# EAGLE board Proto2-PCB v74 (EAGLE 9.7.0)
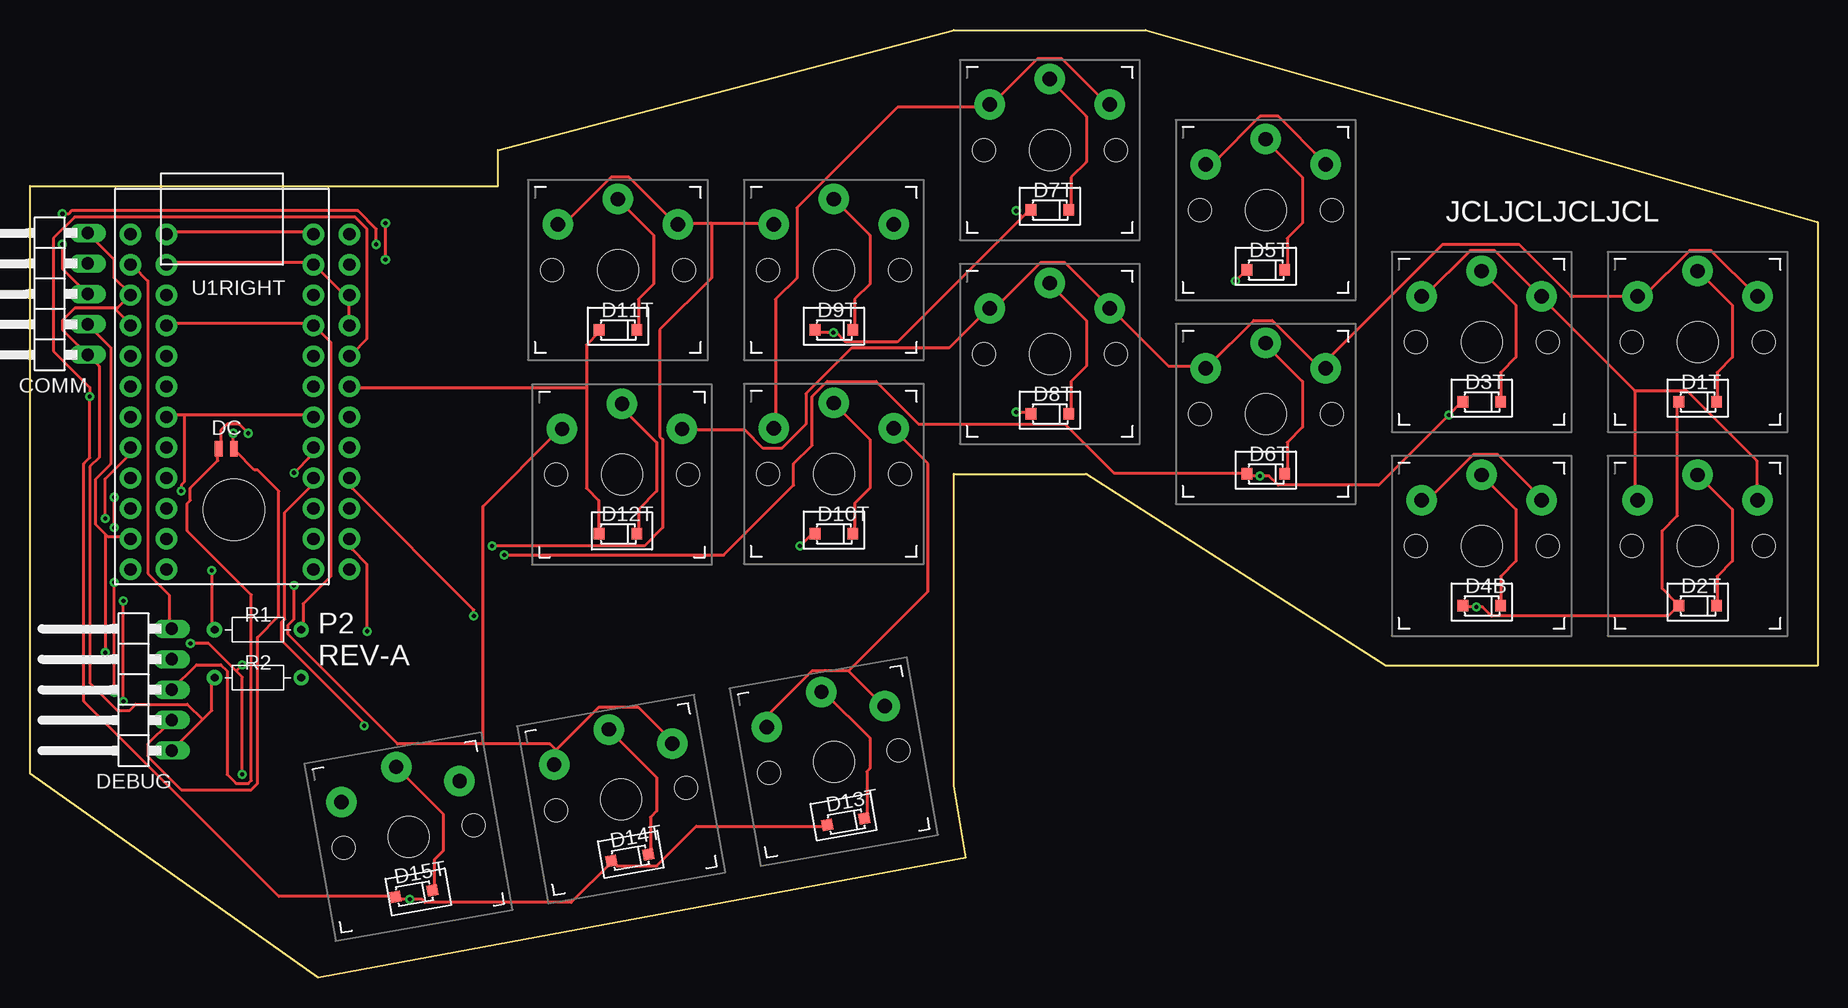
[diagram p0: board, top side]
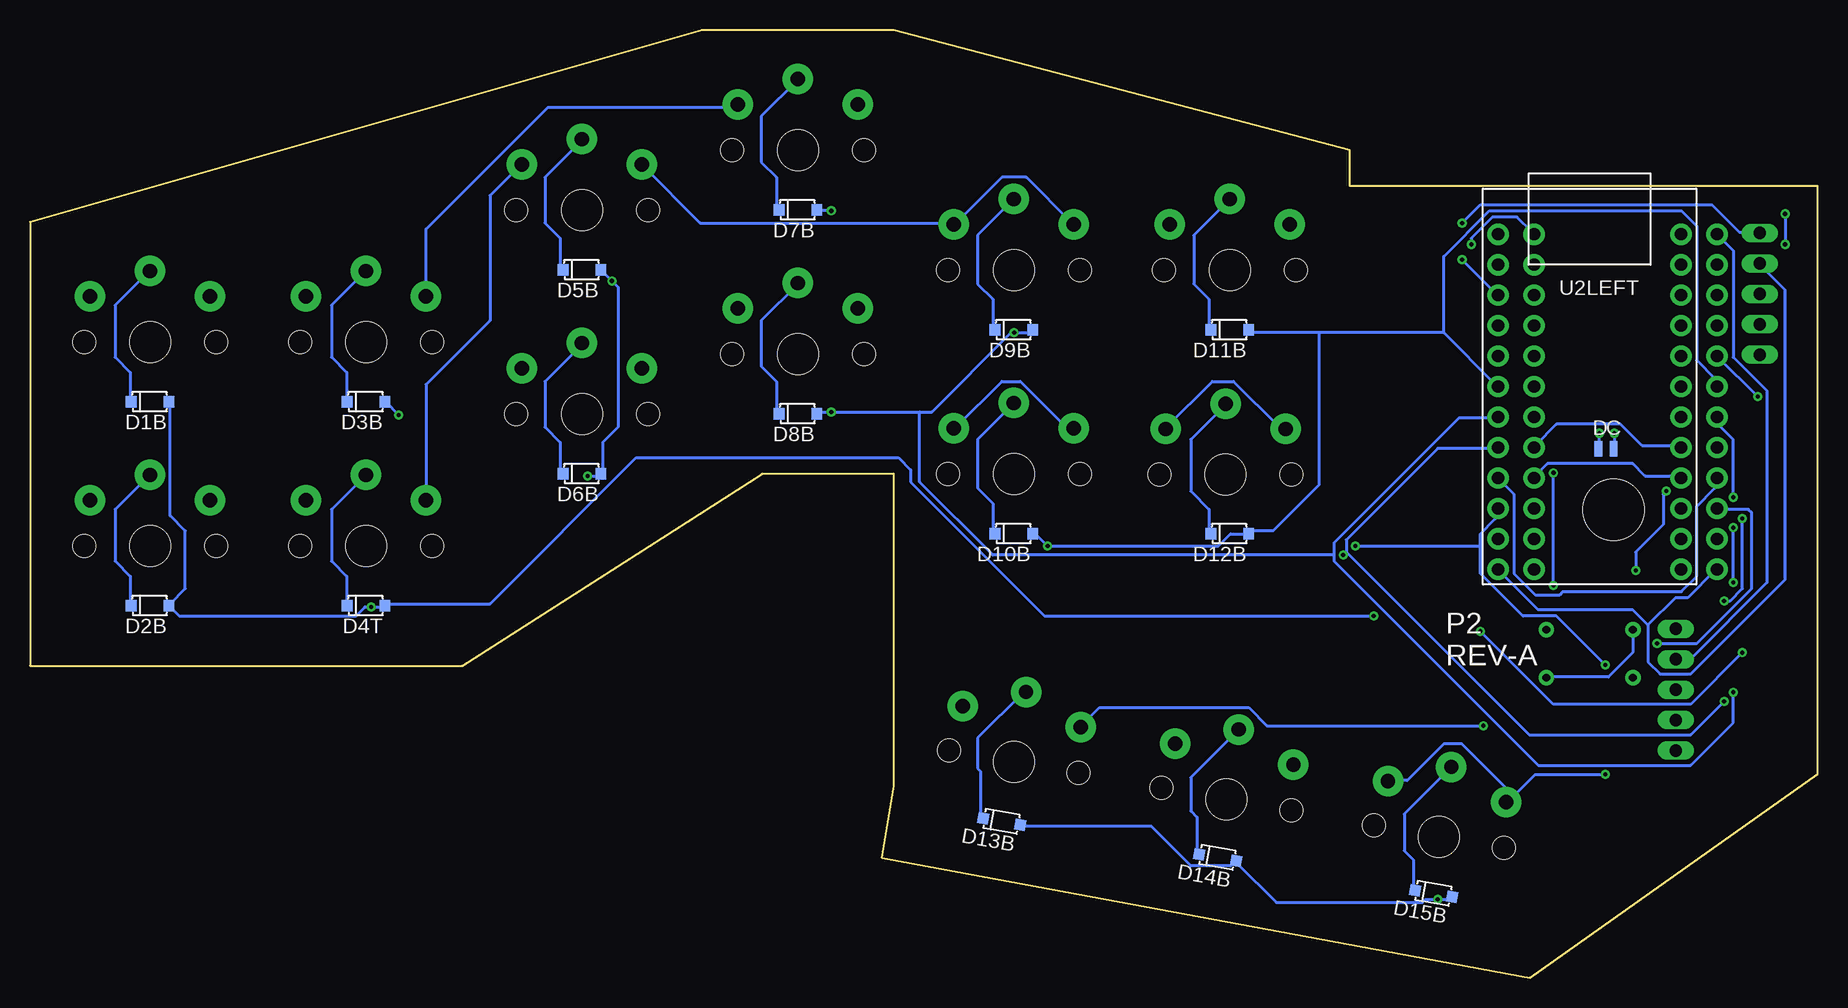
[diagram p1: board, bottom side, seen from below]

Size 149 x 79 mm. Coordinates in mm from the lower left corner, seen from the top.
Outline: 24,0 0,17 0,66 39,66 39,69 77,79 93,79 149,63 149,26 113,26 88,42 77,42 77,16 78,10 24,0
Copper layers (1*16): Top / Bottom
Stack-up Default Layer Stack: Top User Defined 0.035mm / Dielectric-1 User Defined 1.6mm / Bottom User Defined 0.035mm
Design rules "default *": minimum track width 10mil, minimum drill 0.35mm, track to track 10mil, track to pad 10mil, pad to pad 10mil, via to via 10mil, smd to smd 10mil, copper to edge 40mil, drill to drill 12mil, minimum pad ring 10mil, minimum via ring 8mil, stop-mask expansion 4mil, vias tented up to drill 0mil, thermal gap 10mil

## Footprints (pad centres in the part's own frame; a part is rotated, then mirrored left to right if it is on the bottom)
1X05/90 = drill 1.016 long: 1 -5.08,-3.81; 2 -2.54,-3.81; 3 0,-3.81; 4 2.54,-3.81; 5 5.08,-3.81
SOD123 = smd 0.9 x 0.95: A -1.575,0; C 1.575,0
RESAD724W46L381D178B = drill 0.66 pad 1.26: 1 -3.62,0; 2 3.62,0
PG1350 = drill 1.2 pad 2.54: 1 5.9,0; 2B 3.8,5; 2T 3.8,-5 | hole 3.4: 0,0 | hole 1.9: 0,5.5; 0,-5.5
PRO-MICRO-RP2040-SOCKETED = drill 1.016 pad 1.778: 1 -7.62,13.97; 2 -7.62,11.43; 3 -7.62,8.89; 4 -7.62,6.35; 5 -7.62,3.81; 6 -7.62,1.27; 7 -7.62,-1.27; 8 -7.62,-3.81; 9 -7.62,-6.35; 10 -7.62,-8.89; 11 -7.62,-11.43; 12 -7.62,-13.97; 13 7.62,-13.97; 14 7.62,-11.43; 15 7.62,-8.89; 16 7.62,-6.35; 17 7.62,-3.81; 18 7.62,-1.27; 19 7.62,1.27; 20 7.62,3.81; 21 7.62,6.35; 22 7.62,8.89; 23 7.62,11.43; 24 7.62,13.97
SWD-TP-HEADER = smd 0.635 x 1.27 bottom: BOT_C 0,5.08; BOT_D 1.27,5.08 | smd 0.635 x 1.27: TOP_C 0,5.08; TOP_D -1.27,5.08 | hole 5.08: 0,0

## Placement (x,y rotation side)
COMM  PINHD-1X5/90  [1X05/90]  1,57 90 top
D1B  BAV19W  [SOD123]  139,48 180 bottom
D1T  BAV19W  [SOD123]  139,48 0 top
D2B  BAV19W  [SOD123]  139,31 180 bottom
D2T  BAV19W  [SOD123]  139,31 0 top
D3B  BAV19W  [SOD123]  121,48 180 bottom
D3T  BAV19W  [SOD123]  121,48 0 top
D4B  BAV19W  [SOD123]  121,31 0 top
D4T  BAV19W  [SOD123]  121,31 180 bottom
D5B  BAV19W  [SOD123]  103,59 180 bottom
D5T  BAV19W  [SOD123]  103,59 0 top
D6B  BAV19W  [SOD123]  103,42 180 bottom
D6T  BAV19W  [SOD123]  103,42 0 top
D7B  BAV19W  [SOD123]  85,64 180 bottom
D7T  BAV19W  [SOD123]  85,64 0 top
D8B  BAV19W  [SOD123]  85,47 180 bottom
D8T  BAV19W  [SOD123]  85,47 0 top
D9B  BAV19W  [SOD123]  67,54 180 bottom
D9T  BAV19W  [SOD123]  67,54 0 top
D10B  BAV19W  [SOD123]  67,37 180 bottom
D10T  BAV19W  [SOD123]  67,37 0 top
D11B  BAV19W  [SOD123]  49,54 180 bottom
D11T  BAV19W  [SOD123]  49,54 0 top
D12B  BAV19W  [SOD123]  49,37 180 bottom
D12T  BAV19W  [SOD123]  49,37 0 top
D13B  BAV19W  [SOD123]  68,13 170 bottom
D13T  BAV19W  [SOD123]  68,13 10 top
D14B  BAV19W  [SOD123]  50,10 170 bottom
D14T  BAV19W  [SOD123]  50,10 10 top
D15B  BAV19W  [SOD123]  32,7 170 bottom
D15T  BAV19W  [SOD123]  32,7 10 top
DEBUG  PINHD-1X5/90  [1X05/90]  8,24 90 top
R1  DNP  [RESAD724W46L381D178B]  19,29 0 top
R2  DNP  [RESAD724W46L381D178B]  19,25 0 top
SW-LFN-RD  PG1350-PINKA  [PG1350]  139,53 90 top
SW-LFN-RD1  PG1350-PINKA  [PG1350]  139,36 90 top
SW-LFN-RD2  PG1350-PINKA  [PG1350]  121,53 90 top
SW-LFN-RD3  PG1350-PINKA  [PG1350]  121,36 90 top
SW-LFN-RD4  PG1350-PINKA  [PG1350]  103,64 90 top
SW-LFN-RD5  PG1350-PINKA  [PG1350]  103,47 90 top
SW-LFN-RD6  PG1350-PINKA  [PG1350]  85,69 90 top
SW-LFN-RD7  PG1350-PINKA  [PG1350]  85,52 90 top
SW-LFN-RD8  PG1350-PINKA  [PG1350]  67,59 90 top
SW-LFN-RD9  PG1350-PINKA  [PG1350]  67,42 90 top
SW-LFN-RD10  PG1350-PINKA  [PG1350]  49,59 90 top
SW-LFN-RD11  PG1350-PINKA  [PG1350]  49.35,41.93 90 top
SW-LFN-RD12  PG1350-PINKA  [PG1350]  67,18 100 top
SW-LFN-RD13  PG1350-PINKA  [PG1350]  49.27,14.87 100 top
SW-LFN-RD14  PG1350-PINKA  [PG1350]  31.55,11.75 100 top
U1RIGHT  PRO-MICRO-RP2040SOCK  [PRO-MICRO-RP2040-SOCKETED]  16,48 0 top
U2LEFT  PRO-MICRO-RP2040SOCK  [PRO-MICRO-RP2040-SOCKETED]  19,48 0 bottom
U$3  SWD-TP-HEADER  [SWD-TP-HEADER]  17,39 0 top

## Library data of the parts
COMM DEBUG = Connector; CATEGORY: CONNECTOR; SUB-CATEGORY: PIN-HEADER
D1B D1T D2B D2T D3B D3T D4B D4T D5B D5T D6B D6T D7B D7T D8B D8T D9B D9T D10B D10T D11B D11T D12B D12T D13B D13T D14B D14T D15B D15T U1RIGHT U2LEFT U$3 = Keyboard Parts
R1 R2 = Resistor; CATEGORY: Resistor; SUB-CATEGORY: Fixed
SW-LFN-RD = Keyboard Parts; LEFT: Fn; RIGHT: D
SW-LFN-RD1 = Keyboard Parts; LEFT: Sym; RIGHT: Z
SW-LFN-RD2 = Keyboard Parts; LEFT: S1; RIGHT: T
SW-LFN-RD3 = Keyboard Parts; LEFT: S2; RIGHT: S
SW-LFN-RD4 = Keyboard Parts; LEFT: T; RIGHT: L
SW-LFN-RD5 = Keyboard Parts; LEFT: K; RIGHT: G
SW-LFN-RD6 = Keyboard Parts; LEFT: P; RIGHT: P
SW-LFN-RD7 = Keyboard Parts; LEFT: W; RIGHT: B
SW-LFN-RD8 = Keyboard Parts; LEFT: H; RIGHT: F
SW-LFN-RD9 = Keyboard Parts; LEFT: R; RIGHT: R
SW-LFN-RD10 = Keyboard Parts; LEFT: ST1; RIGHT: ST3
SW-LFN-RD11 = Keyboard Parts; LEFT: ST2; RIGHT: ST4
SW-LFN-RD12 = Keyboard Parts; LEFT: N1; RIGHT: N2
SW-LFN-RD13 = Keyboard Parts; LEFT: A; RIGHT: U
SW-LFN-RD14 = Keyboard Parts; LEFT: O; RIGHT: E

## Nets
+3.3V: R1.2 U1RIGHT.21 U2LEFT.21
+5V: COMM.3 U1RIGHT.24 U2LEFT.24
COL-A: D13B.A D13T.A D14B.A D14T.A D15B.A D15T.A U1RIGHT.5 U2LEFT.5
COL-B: D10B.A D10T.A D11B.A D11T.A D12B.A D12T.A U1RIGHT.6 U2LEFT.6
COL-C: D7B.A D7T.A D8B.A D8T.A D9B.A D9T.A U1RIGHT.7 U2LEFT.7
COL-D: D3B.A D3T.A D5B.A D5T.A D6B.A D6T.A U1RIGHT.8 U2LEFT.8
COL-E: D1B.A D1T.A D2B.A D2T.A D4B.A D4T.A U1RIGHT.9 U2LEFT.9
D12T: D12B.C D12T.C SW-LFN-RD11.1
D15T: D15B.C D15T.C SW-LFN-RD14.1
DBGRX: DEBUG.5 U1RIGHT.2
DBGTX: DEBUG.4 U1RIGHT.1
GND: COMM.1 COMM.5 DEBUG.1 R2.1 U1RIGHT.3 U1RIGHT.4 U1RIGHT.23 U2LEFT.3 U2LEFT.4 U2LEFT.23
N$1: D1B.C D1T.C SW-LFN-RD.1
N$2: D2B.C D2T.C SW-LFN-RD1.1
N$3: D3B.C D3T.C SW-LFN-RD2.1
N$4: D4B.C D4T.C SW-LFN-RD3.1
N$5: D5B.C D5T.C SW-LFN-RD4.1
N$6: D6B.C D6T.C SW-LFN-RD5.1
N$7: D7B.C D7T.C SW-LFN-RD6.1
N$8: D8B.C D8T.C SW-LFN-RD7.1
N$9: D9B.C D9T.C SW-LFN-RD8.1
N$10: D10B.C D10T.C SW-LFN-RD9.1
N$12: D11B.C D11T.C SW-LFN-RD10.1
N$13: D13B.C D13T.C SW-LFN-RD12.1
N$14: D14B.C D14T.C SW-LFN-RD13.1
ROW-1: SW-LFN-RD3.2B SW-LFN-RD3.2T SW-LFN-RD4.2B SW-LFN-RD4.2T SW-LFN-RD8.2B SW-LFN-RD8.2T SW-LFN-RD10.2B SW-LFN-RD10.2T SW-LFN-RD14.2B SW-LFN-RD14.2T U1RIGHT.10 U2LEFT.10
ROW-2: SW-LFN-RD5.2B SW-LFN-RD5.2T SW-LFN-RD7.2B SW-LFN-RD7.2T SW-LFN-RD11.2B SW-LFN-RD11.2T SW-LFN-RD13.2B SW-LFN-RD13.2T SW-LFN-RD.2B SW-LFN-RD.2T U1RIGHT.17 U2LEFT.17
ROW-3: SW-LFN-RD1.2B SW-LFN-RD1.2T SW-LFN-RD2.2B SW-LFN-RD2.2T SW-LFN-RD6.2B SW-LFN-RD6.2T SW-LFN-RD9.2B SW-LFN-RD9.2T SW-LFN-RD12.2B SW-LFN-RD12.2T U1RIGHT.16 U2LEFT.16
SERRX: COMM.4 U1RIGHT.12 U2LEFT.12
SERTX: COMM.2 U1RIGHT.11 U2LEFT.11
SIDE: R1.1 R2.2 U1RIGHT.18 U2LEFT.18
SWDCK: DEBUG.2 U$3.BOT_C U$3.TOP_C
SWDIO: DEBUG.3 U$3.BOT_D U$3.TOP_D

## Tracks (layer width: path | path; a pad name or v marks a point on that pad's centre or on a via)
+3.3V
  Top 0.254: R1.2 22.77,29.12 22.77,31.15 25.06,33.44 25.06,53 23.79,54.27 U1RIGHT.21 23.53,54.52 11.59,54.52 U2LEFT.21
+5V  (via drill 0.35)
  Top 0.254: v2.7,61.13 2.7,59.09 4.74,57.06 COMM.3 | v2.7,63.67 3.21,63.67 3.47,63.92 27.34,63.92 28.87,62.4 v28.87,61.13 | U2LEFT.24 11.59,62.14 23.53,62.14 U1RIGHT.24
  Bottom 0.254: v2.7,63.67 v2.7,61.13 | v28.87,61.13 28.87,61.63 27.09,63.41 25.06,63.41 23.79,62.14 U1RIGHT.24
COL-A  (via drill 0.35)
  Top 0.254: U2LEFT.5 26.83,51.98 28.1,53.25 28.1,62.4 27.09,63.41 3.72,63.41 1.94,61.63 1.94,52.24 4.99,49.19 v4.99,48.43 4.99,43.35 4.48,42.84 4.48,23.03 20.74,6.77 30.39,6.77 D15B.A 30.64,6.52 v31.66,6.52 32.68,6.52 32.93,6.26 45.12,6.26 48.42,9.56 D14B.A 48.68,9.56 48.93,9.31 52.23,9.31 55.54,12.61 66.2,12.61 D13B.A
  Bottom 0.254: D15B.A 30.64,6.52 v31.66,6.52 32.68,6.52 32.93,6.26 45.12,6.26 48.42,9.56 D14B.A 48.68,9.56 48.93,9.31 52.23,9.31 55.54,12.61 66.2,12.61 D13B.A | v4.99,48.43 8.29,51.73 U1RIGHT.5
COL-B  (via drill 0.35)
  Top 0.254: v64.17,35.98 65.19,37 D10B.A | 46.39,49.19 46.39,52.74 47.41,53.76 D11B.A | 46.39,49.19 46.39,40.81 47.41,39.79 47.41,37.25 D12B.A | 46.39,49.19 26.83,49.19 U2LEFT.6
  Bottom 0.254: D10B.A 65.19,37 v64.17,35.98 49.95,35.98 48.93,37 47.66,37 D12B.A 47.41,37.25 45.38,37.25 41.57,41.06 41.57,53.76 | 31.15,53.76 41.57,53.76 | 41.57,53.76 47.41,53.76 D11B.A | 31.15,53.76 26.83,49.44 U2LEFT.6 | 31.15,53.76 31.15,60.11 27.34,63.92 11.34,63.92 10.07,62.65 10.07,51.47 8.55,49.95 8.55,49.44 U1RIGHT.6
COL-C  (via drill 0.35)
  Top 0.254: v82.21,47.16 83.22,47.16 D8B.A | 82.71,63.41 83.22,63.92 D7B.A | 82.71,63.41 72.3,53 67.98,53 67.22,53.76 v66.97,53.76 65.44,53.76 D9B.A | 82.71,63.41 v82.21,63.92 | v7.02,37.5 v7.02,40.04 | v7.02,23.79 v7.02,32.93
  Bottom 0.254: 74.84,47.16 v82.21,47.16 83.22,47.16 D8B.A | 74.84,47.16 73.82,47.16 67.22,53.76 v66.97,53.76 65.44,53.76 D9B.A | v82.21,63.92 83.22,63.92 D7B.A | v7.02,40.04 7.02,44.87 8.29,46.14 8.29,46.65 U1RIGHT.7 | v7.02,32.93 v7.02,37.5 | v7.02,23.79 7.02,21.25 10.58,17.69 23.28,17.69 40.3,34.71 40.3,35.22 | 40.3,35.22 40.3,36.23 29.88,46.65 26.83,46.65 U2LEFT.7 | 74.84,47.16 74.84,41.31 68.74,35.22 40.3,35.22
COL-D  (via drill 0.35)
  Top 0.254: v100.49,58.08 101.26,58.84 D5B.A | D3B.A 119.29,47.92 v118.27,46.9 112.43,41.06 104.05,41.06 103.29,41.82 v102.53,41.82 101.51,41.82 D6B.A 101.26,42.08 90.33,42.08 86.27,46.14 74.08,46.14 70.52,49.7 66.46,49.7 65.19,48.43 65.19,44.36 63.66,42.84 63.66,41.06 57.82,35.22 v39.53,35.22 | v6.26,38.27 6.26,41.57 8.29,43.6 8.29,44.11 U1RIGHT.8 | v7.78,23.03 v7.78,31.41
  Bottom 0.254: D5B.A 101.26,58.84 v100.49,58.08 99.99,57.57 99.99,45.89 101.26,44.62 101.26,42.08 D6B.A 101.51,41.82 v102.53,41.82 | v118.27,46.9 119.29,47.92 D3B.A | v6.26,38.27 6.26,32.42 7.28,31.41 v7.78,31.41 | v7.78,23.03 10.58,20.23 24.04,20.23 39.28,35.47 | 39.28,35.47 39.28,36.49 31.66,44.11 26.83,44.11 U2LEFT.8 | 39.28,35.47 v39.53,35.22
COL-E  (via drill 0.35)
  Top 0.254: D4B.A 119.54,30.9 v120.56,30.9 121.07,30.9 121.83,30.14 136.56,30.14 137.32,30.9 D2B.A 137.32,31.15 136.05,32.42 136.05,37.25 137.32,38.52 137.32,47.92 D1B.A | v36.99,30.14 36.99,30.65 26.83,40.81 26.83,41.57 U2LEFT.9
  Bottom 0.254: U1RIGHT.9 8.55,41.57 8.55,40.81 10.07,39.28 10.07,33.44 11.34,32.17 21.25,32.17 21.5,31.92 23.53,31.92 25.31,33.69 25.31,40.3 26.58,41.57 U2LEFT.9 | D1B.A 137.32,47.92 137.32,38.52 136.05,37.25 136.05,32.42 137.32,31.15 D2B.A 137.32,30.9 136.56,30.14 121.83,30.14 121.07,30.9 v120.56,30.9 119.54,30.9 D4B.A 119.29,31.15 110.65,31.15 98.46,43.35 76.62,43.35 75.6,42.33 75.6,41.31 64.43,30.14 v36.99,30.14
D12T
  Top 0.254: D12T.C 50.71,37.25 50.71,39.03 52.23,40.55 52.23,44.62 49.19,47.66 SW-LFN-RD11.1
  Bottom 0.254: D12T.C 50.71,37.25 50.71,39.03 52.23,40.55 52.23,44.87 49.44,47.66 SW-LFN-RD11.1
D15T
  Top 0.254: D15T.C 33.69,7.28 33.69,9.82 34.45,10.58 34.45,13.63 30.64,17.44 SW-LFN-RD14.1
  Bottom 0.254: D15T.C 33.69,7.28 33.69,9.82 34.45,10.58 34.45,13.63 30.64,17.44 SW-LFN-RD14.1
DBGRX
  Top 0.254: DEBUG.5 11.59,29.12 11.59,31.92 9.82,33.69 9.82,58.08 8.55,59.35 U1RIGHT.2
DBGTX
  Bottom 0.254: DEBUG.4 11.59,26.58 10.58,26.58 4.23,32.93 4.23,48.93 7.02,51.73 7.02,60.62 8.29,61.89 U1RIGHT.1
GND  (via drill 0.35)
  Top 0.254: 14.39,21.5 11.85,18.96 DEBUG.1 | 14.39,21.5 15.15,22.26 15.15,24.8 R2.1 | 7.02,55.79 7.28,55.79 8.29,56.81 U1RIGHT.3 8.29,57.06 7.02,58.33 7.02,59.86 4.99,61.89 COMM.5 | 7.02,55.79 3.72,55.79 2.7,54.78 2.7,54.01 4.74,51.98 COMM.1 4.99,51.73 5.75,50.97 5.75,43.35 4.99,42.58 4.99,24.55 7.28,22.26 8.29,22.26 8.8,22.77 13.12,22.77 14.39,21.5 | 7.02,55.79 8.29,54.52 U1RIGHT.4 | v29.63,59.86 v29.63,62.9 | U2LEFT.23 11.59,59.6 23.53,59.6 U1RIGHT.23 23.79,59.35 26.07,57.06 26.58,57.06 U2LEFT.3 26.58,56.81 26.58,54.52 U2LEFT.4
  Bottom 0.254: v29.63,62.9 28.1,64.43 8.8,64.43 6.51,62.14 4.99,62.14 COMM.5 | v29.63,59.86 26.83,57.06 U2LEFT.3
N$1
  Top 0.254: D1B.C 140.63,48.17 140.63,50.46 141.9,51.73 141.9,56.05 139.1,58.84 SW-LFN-RD.1
  Bottom 0.254: D1B.C 140.63,48.17 140.63,50.46 141.9,51.73 141.9,56.05 139.1,58.84 SW-LFN-RD.1
N$2
  Top 0.254: D2B.C 140.63,31.15 140.63,33.44 141.9,34.71 141.9,39.03 139.1,41.82 SW-LFN-RD1.1
  Bottom 0.254: D2B.C 140.63,31.15 140.63,33.44 141.9,34.71 141.9,39.03 139.1,41.82 SW-LFN-RD1.1
N$3
  Top 0.254: D3B.C 122.59,48.17 122.59,50.46 123.86,51.73 123.86,56.05 121.07,58.84 SW-LFN-RD2.1
  Bottom 0.254: D3B.C 122.59,48.17 122.59,50.46 123.86,51.73 123.86,56.05 121.07,58.84 SW-LFN-RD2.1
N$4
  Top 0.254: D4B.C 122.59,31.15 122.59,33.44 123.86,34.71 123.86,39.03 121.07,41.82 SW-LFN-RD3.1
  Bottom 0.254: D4B.C 122.59,31.15 122.59,33.44 123.86,34.71 123.86,39.03 121.07,41.82 SW-LFN-RD3.1
N$5
  Top 0.254: D5B.C 104.81,59.09 104.81,61.63 106.08,62.9 106.08,66.71 103.03,69.76 SW-LFN-RD4.1
  Bottom 0.254: D5B.C 104.81,59.09 104.81,61.63 106.08,62.9 106.08,66.71 103.03,69.76 SW-LFN-RD4.1
N$6
  Top 0.254: D6B.C 104.81,42.08 104.81,44.62 106.08,45.89 106.08,49.7 103.03,52.74 SW-LFN-RD5.1
  Bottom 0.254: D6B.C 104.81,42.08 104.81,44.62 106.08,45.89 106.08,49.7 103.03,52.74 SW-LFN-RD5.1
N$7
  Top 0.254: D7B.C 86.78,64.17 86.78,66.71 88.05,67.98 88.05,71.79 85,74.84 SW-LFN-RD6.1
  Bottom 0.254: D7B.C 86.78,64.17 86.78,66.71 88.05,67.98 88.05,71.79 85,74.84 SW-LFN-RD6.1
N$8
  Top 0.254: D8B.C 86.78,47.16 86.78,49.7 88.05,50.97 88.05,54.78 85,57.82 SW-LFN-RD7.1
  Bottom 0.254: D8B.C 86.78,47.16 86.78,49.7 88.05,50.97 88.05,54.78 85,57.82 SW-LFN-RD7.1
N$9
  Top 0.254: D9B.C 68.74,54.01 68.74,56.55 70.01,57.82 70.01,61.89 67.22,64.68 SW-LFN-RD8.1
  Bottom 0.254: D9B.C 68.74,54.01 68.74,56.55 70.01,57.82 70.01,61.89 67.22,64.68 SW-LFN-RD8.1
N$10
  Top 0.254: D10B.C 68.74,37.25 68.74,39.54 70.01,40.81 70.01,44.87 67.22,47.66 SW-LFN-RD9.1
  Bottom 0.254: D10B.C 68.74,37.25 68.74,39.54 70.01,40.81 70.01,44.87 67.22,47.66 SW-LFN-RD9.1
N$12
  Top 0.254: D11T.C 50.71,54.01 50.71,56.55 51.98,57.82 51.98,61.89 49.19,64.68 SW-LFN-RD10.1
  Bottom 0.254: D11T.C 50.71,54.01 50.71,56.55 51.98,57.82 51.98,61.89 49.19,64.68 SW-LFN-RD10.1
N$13
  Top 0.254: D13B.C 69.76,13.37 69.76,17.18 70.01,17.44 70.01,19.98 66.2,23.79 SW-LFN-RD12.1
  Bottom 0.254: D13B.C 69.76,13.37 69.76,17.18 70.01,17.44 70.01,19.98 66.2,23.79 SW-LFN-RD12.1
N$14
  Top 0.254: D14T.C 51.73,10.33 51.73,13.37 52.23,13.88 52.23,16.68 48.42,20.49 SW-LFN-RD13.1
  Bottom 0.254: D14T.C 51.73,10.33 51.73,13.37 52.23,13.88 52.23,16.68 48.42,20.49 SW-LFN-RD13.1
ROW-1  (via drill 0.35)
  Top 0.254: v13.37,27.85 14.9,27.85 17.18,25.57 | 17.18,25.57 17.69,25.06 v17.69,16.93 | 17.18,25.57 v17.69,26.07 | SW-LFN-RD10.2B 44.11,62.9 44.61,62.9 48.42,66.71 49.95,66.71 53.76,62.9 SW-LFN-RD10.2T 54.01,62.9 56.81,62.9 | 56.81,62.9 61.89,62.9 SW-LFN-RD8.2B | SW-LFN-RD3.2B 116.24,40.04 116.75,40.04 120.31,43.6 122.34,43.6 125.89,40.04 SW-LFN-RD3.2T | SW-LFN-RD4.2B 98.21,67.98 98.72,67.98 102.53,71.79 104.05,71.79 107.86,67.98 SW-LFN-RD4.2T | v38.52,35.98 51.22,35.98 52.74,37.5 52.74,44.87 52.49,45.12 52.49,54.01 56.81,58.33 56.81,62.9
  Bottom 0.254: v13.37,27.85 10.07,27.85 5.5,32.42 5.5,38.77 5.75,39.03 8.29,39.03 U1RIGHT.10 | v17.69,16.93 23.53,16.93 25.31,15.15 | 25.31,15.15 25.82,14.64 SW-LFN-RD14.2B 25.31,15.15 | 28.1,35.98 28.1,33.69 24.55,30.14 21.75,30.14 v17.69,26.07 | 28.1,35.98 28.1,37 26.83,38.27 26.83,39.03 U2LEFT.10 | 25.31,15.15 29.63,19.47 31.15,19.47 34.2,16.42 35.72,16.42 SW-LFN-RD14.2T | SW-LFN-RD8.2B 62.14,62.9 65.95,66.71 67.98,66.71 71.79,62.9 SW-LFN-RD8.2T 72.05,62.9 93.13,62.9 97.95,67.73 SW-LFN-RD4.2B | SW-LFN-RD3.2B 115.99,40.04 115.99,49.44 110.65,54.78 110.65,65.19 108.11,67.73 SW-LFN-RD4.2T | v38.52,35.98 28.1,35.98
ROW-2  (via drill 0.35)
  Top 0.254: 43.85,18.96 43.85,17.95 SW-LFN-RD13.2B 43.85,18.96 | 43.85,18.96 47.41,22.52 50.71,22.52 53.5,19.72 SW-LFN-RD13.2T | v22.01,42.08 23.53,43.6 23.53,44.11 U1RIGHT.17 | v22.01,32.68 22.01,29.88 21.5,29.38 21.5,28.61 30.64,19.47 37.76,19.47 | 37.76,19.47 43.34,19.47 43.85,18.96 | 37.76,19.47 37.76,39.28 44.11,45.63 SW-LFN-RD11.2B | SW-LFN-RD.2T 143.93,56.81 140.12,60.62 138.34,60.62 134.53,56.81 134.02,56.81 SW-LFN-RD.2B 133.77,56.81 128.43,56.81 124.12,61.13 117.77,61.13 107.61,50.97 | 107.61,50.97 107.35,50.97 103.54,54.78 102.02,54.78 98.21,50.97 SW-LFN-RD5.2B 97.95,50.97 94.91,50.97 90.08,55.79 SW-LFN-RD7.2T 89.83,56.05 86.27,59.6 84.24,59.6 80.68,56.05 80.17,56.05 SW-LFN-RD7.2B 79.92,55.79 76.62,52.49 68.49,52.49 64.68,48.68 64.68,46.14 62.65,44.11 61.12,44.11 59.6,45.63 54.52,45.63 SW-LFN-RD11.2T | 107.61,50.97 107.86,50.97 SW-LFN-RD5.2T 107.61,50.97
  Bottom 0.254: SW-LFN-RD11.2B 44.36,45.89 44.87,45.89 48.68,49.7 50.46,49.7 54.27,45.89 SW-LFN-RD11.2T | U2LEFT.17 11.59,44.36 14.64,44.36 16.42,46.14 21.75,46.14 23.53,44.36 U1RIGHT.17 | v22.01,32.68 v22.01,42.08
ROW-3  (via drill 0.35)
  Top 0.254: 68.24,25.57 65.19,25.57 61.63,22.01 61.63,20.99 SW-LFN-RD12.2B | 68.24,25.57 71.03,22.77 SW-LFN-RD12.2T | v27.85,20.99 27.85,21.25 20.99,28.11 20.99,29.63 21.25,29.88 21.25,38.77 23.53,41.06 23.53,41.57 U1RIGHT.16 | 68.24,25.57 74.84,32.17 74.84,42.84 72.05,45.63 SW-LFN-RD9.2T | SW-LFN-RD6.2T 89.83,72.81 86.02,76.62 83.98,76.62 80.17,72.81 SW-LFN-RD6.2B 79.92,72.56 72.3,72.56 63.92,64.17 63.92,58.33 62.14,56.55 62.14,45.89 SW-LFN-RD9.2B | SW-LFN-RD2.2B 116.24,56.81 120.05,60.62 122.08,60.62 125.89,56.81 SW-LFN-RD2.2T 126.15,56.55 133.77,48.93 | 133.77,48.93 133.77,40.04 SW-LFN-RD1.2B | 133.77,48.93 138.09,48.93 143.93,43.09 143.93,40.04 SW-LFN-RD1.2T
  Bottom 0.254: SW-LFN-RD9.2B 62.14,45.89 62.65,45.89 66.46,49.7 67.98,49.7 71.79,45.89 SW-LFN-RD9.2T | U2LEFT.16 11.59,41.82 14.39,41.82 15.4,42.84 22.52,42.84 23.53,41.82 U1RIGHT.16 | v27.85,20.99 45.88,20.99 47.41,22.52 59.85,22.52 61.38,20.99 SW-LFN-RD12.2B | SW-LFN-RD6.2T 90.08,72.56 105.83,72.56 115.99,62.4 115.99,56.81 SW-LFN-RD2.2B
SERRX
  Bottom 0.254: 14.13,29.38 14.13,26.33 13.12,25.31 10.58,25.31 2.7,33.19 2.7,57.32 4.74,59.35 COMM.4 | 14.13,29.38 11.85,31.66 10.83,31.66 8.55,33.95 U1RIGHT.12 | 14.13,29.38 15.4,30.65 23.28,30.65 26.58,33.95 U2LEFT.12
SERTX  (via drill 0.35)
  Top 0.254: 6.26,37 6.51,36.74 8.29,36.74 U1RIGHT.11 | 6.26,37 5.5,37.76 5.5,41.57 6.77,42.84 6.77,52.49 4.99,54.27 COMM.2 | v28.1,28.87 28.1,34.46 26.83,35.73 26.83,36.49 U2LEFT.11 | 6.26,37 v6.26,27.09
  Bottom 0.254: v28.1,28.87 22.01,22.77 10.58,22.77 v6.26,27.09
SIDE  (via drill 0.35)
  Top 0.254: 12.86,46.9 23.53,46.9 U1RIGHT.18 | 12.86,46.9 11.59,46.9 U2LEFT.18 | v15.15,33.95 15.15,29.12 R1.1 | v12.61,40.55 12.61,41.06 12.86,41.31 12.86,46.9
  Bottom 0.254: R2.2 22.52,25.06 17.44,25.06 15.4,27.09 15.4,28.87 R1.1 | v15.15,33.95 15.15,35.47 12.86,37.76 12.86,40.3 v12.61,40.55
SWDCK  (via drill 0.35)
  Top 0.254: v16.93,45.38 16.93,44.11 U$3.TOP_C 17.18,43.85 18.71,42.33 18.96,42.33 20.74,40.55 20.74,30.14 18.96,28.36 18.96,16.17 18.45,15.66 12.61,15.66 9.82,18.45 9.82,19.47 11.59,21.25 DEBUG.2
  Bottom 0.254: v16.93,45.38 16.93,44.11 U$3.TOP_C
SWDIO  (via drill 0.35)
  Top 0.254: v18.2,45.38 17.44,46.14 16.42,46.14 15.91,45.63 15.91,44.11 U$3.TOP_D 15.66,43.85 15.66,43.09 13.37,40.81 13.37,39.79 13.12,39.54 13.12,37.25 18.45,31.92 18.45,16.42 18.2,16.17 17.18,16.17 16.42,16.93 16.42,25.57 15.91,26.07 13.88,26.07 11.85,24.04 DEBUG.3
  Bottom 0.254: v18.2,45.38 18.2,44.11 U$3.BOT_D

## Text on the board
tPlace: JCLJCLJCLJCL | P2 / REV-A
bPlace: P2 / REV-A